# Altium PCB Prueba.PcbDoc
Units mil, origin at the board's own origin, x right, y up, seen from the top; angles counter-clockwise.
Board outline 6000 x 4000 mil, 2 copper layers (Top Layer, Bottom Layer); 65 components, 45 nets, 228 pads, 0 vias.
Unrouted connection lines stored in the file: 167.
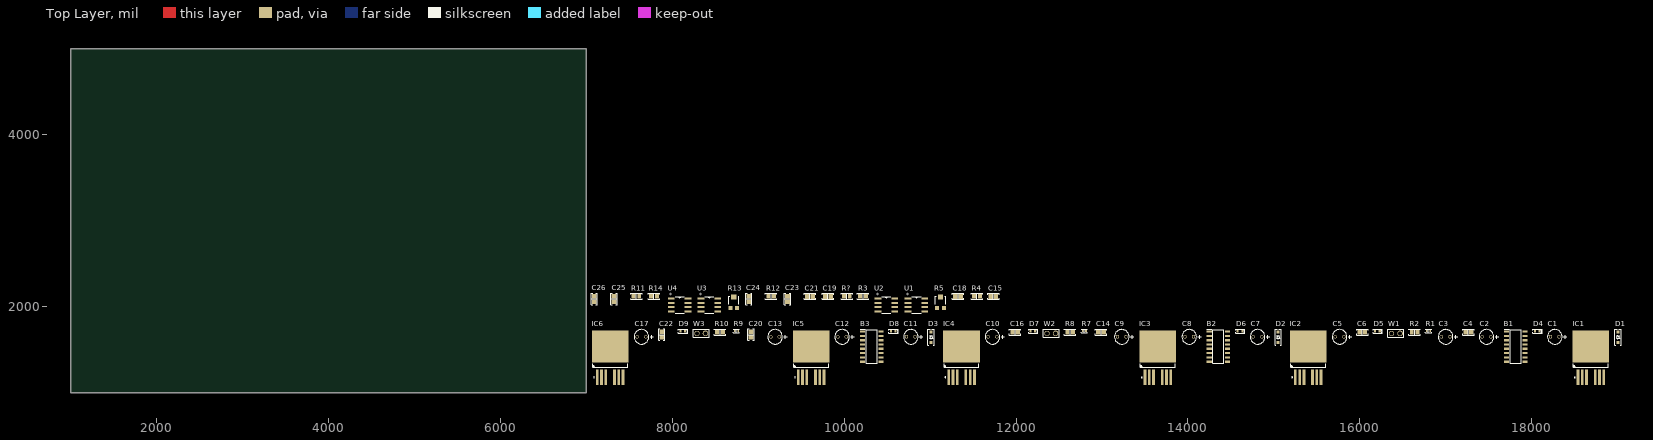
[diagram p0: Top Layer view]
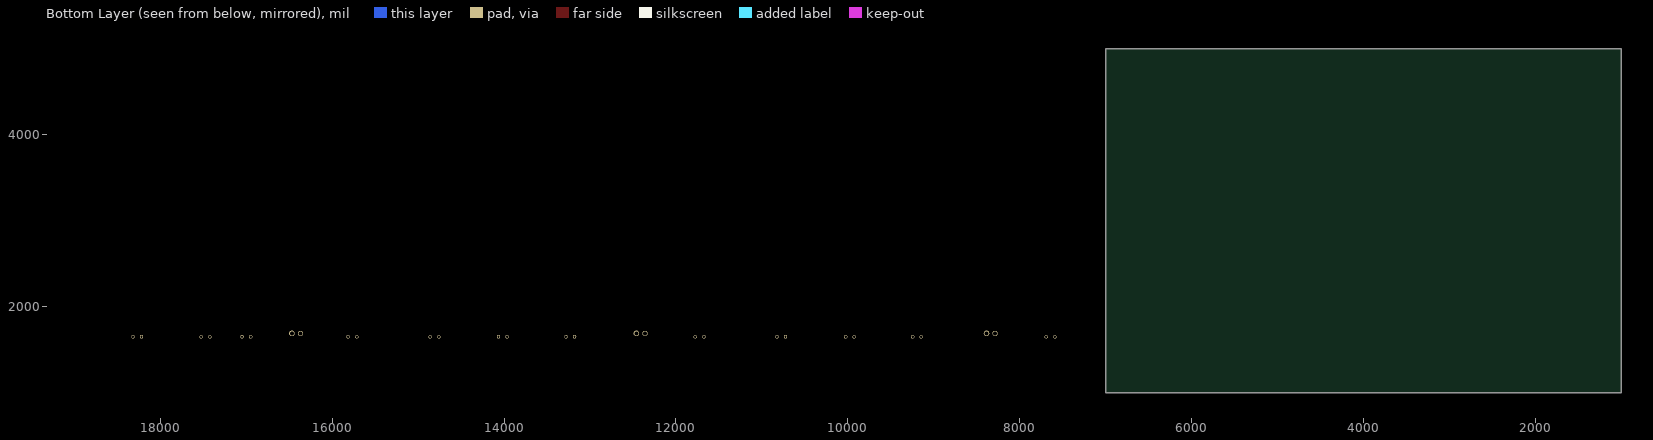
[diagram p1: Bottom Layer view, seen from below]

## Layer stack, top to bottom
Top Solder: solder mask 0.4, Solder Resist, Dk 3.5
Top Layer: signal copper 1.4
Dielectric 1: dielectric 12.6, FR-4, Dk 4.8
Bottom Layer: signal copper 1.4
Bottom Solder: solder mask 0.4, Solder Resist, Dk 3.5

## Board outline
1000,1000 7000,1000 7000,5000 1000,5000

## Design rules (kind name [scope] priority, off if disabled: settings)
Clearance [All] p1: gap=10 ignorepadtopadclearanceinfootprint=FALSE except(0: Arc-Hole Track-Hole SMDPad-Hole THPad-Hole Via-Hole Fill-Hole Poly-Hole Region-Hole Text-Hole)
PolygonConnect [All] p1: connectstyle=Relief reliefconductorwidth=10 reliefentries=4 polygonreliefangle="90 Angle" airgapwidth=10
RoutingVias [All] p1: holewidth=28 width=50 viastyle="Through Hole" minholewidth=28 minwidth=50 maxholewidth=28 maxwidth=50
SolderMaskExpansion [All] p1: expansion=4 istentingtop=FALSE
Width [All] p1: maxlimit=10 minlimit=10 preferedwidth=10
30 further rules are at their usual default settings.

## Components (designator, comment, footprint, x,y, rotation, side; value= is the part's Value field where it differs from the comment)
B1 "SI8238BB-D-IS1" SOIC127P600X175-16N 17815,1535 r0 top
B2 "SI8238BB-D-IS1" SOIC127P600X175-16N 14355,1535 r0 top
B3 "SI8238BB-D-IS1" SOIC127P600X175-16N 10320,1535 r0 top
C1 "Cap Pol1" CapacitorRadialElectrolytic 18220,1650 r0 top value=1uF
C2 "Cap Pol1" CapacitorRadialElectrolytic 17425,1650 r0 top value=CB
C3 "Cap Pol1" CapacitorRadialElectrolytic 16950,1650 r0 top value=1uF
C4 "0.1 µF" "CAP 0805_2012" 17265,1705 r0 top
C5 "Cap Pol1" CapacitorRadialElectrolytic 15715,1650 r0 top value=10uF
C6 "0.1 µF" "CAP 0805_2012" 16030,1705 r0 top
C7 "Cap Pol1" CapacitorRadialElectrolytic 14760,1650 r0 top value=1uF
C8 "Cap Pol1" CapacitorRadialElectrolytic 13965,1650 r0 top value=CB
C9 "Cap Pol1" CapacitorRadialElectrolytic 13180,1650 r0 top value=1uF
C10 "Cap Pol1" CapacitorRadialElectrolytic 11675,1650 r0 top value=10uF
C11 "Cap Pol1" CapacitorRadialElectrolytic 10725,1650 r0 top value=1uF
C12 "Cap Pol1" CapacitorRadialElectrolytic 9925,1650 r0 top value=CB
C13 "Cap Pol1" CapacitorRadialElectrolytic 9145,1650 r0 top value=1uF
C14 "0.1 µF" "CAP 0805_2012" 12990,1705 r0 top
C15 "0.1 µF" "CAP 0805_2012" 11735,2120 r0 top
C16 "0.1 µF" "CAP 0805_2012" 11990,1705 r0 top
C17 "Cap Pol1" CapacitorRadialElectrolytic 7590,1650 r0 top value=10uF
C18 "0.1 µF" "CAP 0805_2012" 11325,2120 r0 top
C19 "0.1 µF" "CAP 0805_2012" 9810,2120 r0 top
C20 "0.1 µF" "CAP 0805_2012" 8915,1675 r90 top
C21 "0.1 µF" "CAP 0805_2012" 9600,2120 r0 top
C22 "0.1 µF" "CAP 0805_2012" 7875,1675 r90 top
C23 "0.1 µF" "CAP 0805_2012" 9340,2090 r90 top
C24 "0.1 µF" "CAP 0805_2012" 8890,2090 r90 top
C25 "0.1 µF" "CAP 0805_2012" 7320,2090 r90 top
C26 "0.1 µF" "CAP 0805_2012" 7090,2090 r90 top
D1 "1N4148W-G RHG" SOD-123 19005,1645 r90 top
D2 "1N4148W-G RHG" SOD-123 15050,1645 r90 top
D3 "1N4148W-G RHG" SOD-123 11010,1645 r90 top
D4 "1PS79SB10,115" SOD-523 18065,1715 r0 top
D5 "1PS79SB10,115" SOD-523 16205,1715 r0 top
D6 "1PS79SB10,115" SOD-523 14605,1715 r0 top
D7 "1PS79SB10,115" SOD-523 12195,1715 r0 top
D8 "1PS79SB10,115" SOD-523 10570,1715 r0 top
D9 "1PS79SB10,115" SOD-523 8120,1715 r0 top
IC1 "IRFS3006TRL7PP" "INFINEON TO-263-7" 18690,1405 r90 top
IC2 "IRFS3006TRL7PP" "INFINEON TO-263-7" 15400,1405 r90 top
IC3 "IRFS3006TRL7PP" "INFINEON TO-263-7" 13650,1405 r90 top
IC4 "IRFS3006TRL7PP" "INFINEON TO-263-7" 11365,1405 r90 top
IC5 "IRFS3006TRL7PP" "INFINEON TO-263-7" 9615,1405 r90 top
IC6 "IRFS3006TRL7PP" "INFINEON TO-263-7" 7275,1405 r90 top
R1 "270 mOhms" "STACKPOLE CSR0402" 16800,1720 r0 top
R2 "RDT" "RES 0805_2012" 16640,1705 r0 top
R3 "?" "RES 0805_2012" 10220,2120 r0 top
R4 "?" "RES 0805_2012" 11545,2120 r0 top
R5 "20 kOhms" "POT BOURNS TRIMPOT TC33" 11120,2055 r0 top
R7 "270 mOhms" "STACKPOLE CSR0402" 12795,1720 r0 top
R8 "RDT" "RES 0805_2012" 12630,1705 r0 top
R9 "270 mOhms" "STACKPOLE CSR0402" 8745,1720 r0 top
R10 "RDT" "RES 0805_2012" 8555,1705 r0 top
R11 "?" "RES 0805_2012" 7580,2120 r0 top
R12 "?" "RES 0805_2012" 9150,2120 r0 top
R13 "20 kOhms" "POT BOURNS TRIMPOT TC33" 8715,2055 r0 top
R14 "?" "RES 0805_2012" 7785,2120 r0 top
R? "?" "RES 0805_2012" 10030,2120 r0 top
U1 "INA148UAG4" D8 10840,2020 r0 top
U2 "OPA277UA" D8 10490,2020 r0 top
U3 "INA148UAG4" D8 8430,2020 r0 top
U4 "OPA277UA" D8 8085,2020 r0 top
W1 "Jumper" Jumper_2_pos 16420,1690 r0 top
W2 "Jumper" Jumper_2_pos 12410,1690 r0 top
W3 "Jumper" Jumper_2_pos 8335,1690 r0 top

## Footprints (in the part's own frame and the unit in brackets; to place one, negate y for a bottom-side part, rotate by r counter-clockwise, add the part's x,y. Pads: shape width x height; smd on the part's side, far side on the other; paste and mask are expansions set on the pad)
"CAP 0805_2012" [mm] "Chip Capacitor, 2-Leads, Body 2.00x1.20mm, IPC Medium Density"
  rect 1.3x1.4 smd: 1(-0.8,0) 2(0.8,0)
  silkscreen extent -1.7,-0.9 1.7,0.9, body extent -1,-0.64 1,0.64, height 1.26
CapacitorRadialElectrolytic [mil]
  round 40 / inner round 50 / far side round 40 hole 28: 1(0,0) 2(100,0)
  silkscreen extent -35,-85 190,85
D8 [mil]
  rect 78x22 smd paste-39 mask-39: 1(-97,75) 2(-97,25) 3(-97,-25) 4(-97,-75) 5(97,-75) 6(97,-25) 7(97,25) 8(97,75)
  silkscreen extent -54,-98 54,98, body extent -122,-99 122,99, height 69
"INFINEON TO-263-7" [mm] "D2-PAK, 7-Pads, Body 7.82x8.52mm (max), IPC Medium Density"
  rect 4.6x0.8 smd: 1(-5.775,3.81) 2(-5.775,2.54) 3(-5.775,1.27) 5(-5.775,-1.27) 6(-5.775,-2.54) 7(-5.775,-3.81)
  rect 9.4x10.8 smd: 8(3.375,0)
  silkscreen extent -5.9,-5.15 -1.73,5.15, body extent -7.62,-5.08 7.63,5.08, height 4.54
Jumper_2_pos [mil] "2 pins jumper."
  round 60 hole 45: 1(-50,0)
  round 65 hole 45: 2(50,0)
  silkscreen extent -95,-45 95,50, body extent -78,-37 80,41, height 207
"POT BOURNS TRIMPOT TC33" [mm] "Bourns Trimpot TC33X-1 - Open Frame 3mm x 3.8mm x 1.2mm"
  rect 1.2x1.2 smd: 1(-1,-1.8) 3(1,-1.8)
  rect 1.6x1.5 smd: 2(0,1.45)
  silkscreen extent -1.5,-0.6 1.5,1.75, body extent -1.8,-1.91 1.8,1.95, height 1.15
"RES 0805_2012" [mm] "Chip Resistor, 2-Leads, Body 2.00x1.25mm, IPC Medium Density"
  rect 1.15x1.35 smd: 1(-0.875,0) 2(0.875,0)
  silkscreen extent -1.7,-0.9 1.7,0.9, body extent -1,-0.62 1,0.63, height 0.6
SOD-123 [mm] "SOD, 2-Leads, Body 1.55x3.70mm, IPC Medium Density"
  rect 0.9x0.95 smd: 1(-1.575,0) 2(1.575,0)
  silkscreen extent -2.3,-0.92 2.41,0.92, body extent -1.86,-0.78 1.86,0.77, height 1.35
SOD-523 [mm] "Molded Diode, 2-Leads, Body 1.60x0.80mm, IPC Medium Density"
  rect 0.6x0.7 smd: 1(-0.71,0) 2(0.71,0)
  silkscreen extent -1.27,-0.6 1.47,0.6, body extent -0.8,-0.4 0.8,0.4, height 0.82
SOIC127P600X175-16N [mm]
  rect 1.5x0.65 smd: 1(-2.7,4.445) 2(-2.7,3.175) 3(-2.7,1.905) 4(-2.7,0.635) 5(-2.7,-0.635) 6(-2.7,-1.905) 7(-2.7,-3.175) 8(-2.7,-4.445) 9(2.7,-4.445) 10(2.7,-3.175) 11(2.7,-1.905) 12(2.7,-0.635) 13(2.7,0.635) 14(2.7,1.905) 15(2.7,3.175) 16(2.7,4.445)
  silkscreen extent -3.45,-4.95 1.6,5.12
"STACKPOLE CSR0402" [mm] "Chip Resistor, 2-Leads, Body 1.0x0.5mm, IPC Medium Density"
  rect 0.5x0.6 smd: 1(-0.5,0) 2(0.5,0)
  silkscreen extent -0.9,-0.51 0.9,0.51, body extent -0.52,-0.25 0.53,0.25, height 0.32

## Part data
B1 B2 B3: "SILICON LABS - SI8238BB-D-IS1 - DIGITAL ISOLATOR, 30NS, NSOIC-16", Manufacturer_Name="Silicon Labs", Mouser Part Number=634-SI8238BB-D-IS1, Arrow Part Number=SI8238BB-D-IS1, Arrow Price/Stock=https://www.arrow.com/en/products/si8238bb-d-is1/silicon-labs, Datasheet Link=https://datasheet.datasheetarchive.com/originals/distributors/DKDS-37/728994.pdf, Geometry.Height=1.75mm, Manufacturer_Part_Number=SI8238BB-D-IS1, Mouser Price/Stock=https://www.mouser.co.uk/ProductDetail/Silicon-Labs/SI8238BB-D-IS1?qs=p9T7GgSe1IEr3RhvGCWqzw%3D%3D
C1 C2 C3 C5 C7 C8 C9 C10 C11 C12 C13 C17: "Polarized Capacitor (Radial)", LatestRevisionDate=17-Jul-2002, LatestRevisionNote="Re-released for DXP Platform.", PackageDescription="Polarized Capacitor (Radial); 2 Leads", PackageReference=RB7.6-15, Published=8-Jun-2000, Publisher="Altium Limited"
C4 C6 C14 C15 C16 C18 C19 C20 C21 C22 C23 C24 C25 C26: library part CC0805MRX7R9BB104, "CAP CER 0.1UF 50V X7R 0805", Device Package="0805 (2012 Metric)", Manufacturer=Yageo, Operating Temperature="-55°C ~ 125°C", Supplier Part Number 1=311-4351-1-ND, Temperature Coefficient=X7R, Tolerance=±20%, Voltage - Rated=50V, Applications="General Purpose", Capacitance="0.1 µF", ComponentLink1Description=Datasheet, ComponentLink1URL=https://www.yageo.com/upload/media/product/productsearch/datasheet/mlcc/UPY-GPHC_X7R_6.3V-to-50V_18.pdf, ComponentLink2Description="DigiKey Link", ComponentLink2URL=https://www.digikey.com/en/products/detail/yageo/CC0805MRX7R9BB104/5884281, LastUpdated="15/11/2023 20:14:20", Lifecycle Status=Active, Minimum Order=1, Mounting Type="Surface Mount, MLCC", Package / Case="0805 (2012 Metric)", Packaging=TapeAndReel, Part Number=CC0805MRX7R9BB104, Part Status=Active, PartId=2475, Price=0.01, Series=CC, Size / Dimension="0.079\" L x 0.049\" W (2.00mm x 1.25mm)", Supplier 1=DigiKey, Thickness (Max)="0.037\" (0.95mm)"
D1 D2 D3: "DIODE GEN PURP 100V 150MA SOD123", Capacitance @ Vr, F="2pF @ 0V, 1MHz", Current - Average Rectified (Io)=150mA, Current - Reverse Leakage @ Vr="2.5 µA @ 75 V", Manufacturer="Taiwan Semiconductor Corporation", Operating Temperature - Junction="-65°C ~ 150°C", Package / Case=SOD-123, Supplier Part Number 1=1N4148W-GRHGCT-ND, Voltage - DC Reverse (Vr) (Max)="100 V", Voltage - Forward (Vf) (Max) @ If="1.25 V @ 150 mA", ComponentLink1Description=Datasheet, ComponentLink1URL=https://www.taiwansemi.com/products/datasheet/1N4148W-G_D1601.pdf, ComponentLink2Description="DigiKey Link", ComponentLink2URL=https://www.digikey.com/en/products/detail/taiwan-semiconductor-corporation/1N4148W-G-RHG/7374103, Diode Type=Standard, LastUpdated="02/11/2023 20:45:33", Lifecycle Status=Active, Minimum Order=1, Mounting Type="Surface Mount", Packaging=TapeAndReel, Part Number="1N4148W-G RHG", Part Status=Active, PartId=1018, Price=0.02, Reverse Recovery Time (trr)="4 ns", Series=-, Speed="Small Signal =< 200mA (Io), Any Speed", Supplier 1=DigiKey, Supplier Device Package=SOD-123
D4 D5 D6 D7 D8 D9: "DIODE SCHOTTKY 30V 200MA SOD523", Capacitance @ Vr, F="10pF @ 1V, 1MHz", Current - Average Rectified (Io)=200mA, Current - Reverse Leakage @ Vr="2 µA @ 25 V", Manufacturer="Nexperia USA Inc.", Operating Temperature - Junction="125°C (Max)", Package / Case="SC-79, SOD-523", Supplier Device Package=SOD-523, Supplier Part Number 1=1727-4780-1-ND, Voltage - DC Reverse (Vr) (Max)="30 V", Voltage - Forward (Vf) (Max) @ If="800 mV @ 100 mA", ComponentLink1Description=Datasheet, ComponentLink1URL=https://assets.nexperia.com/documents/data-sheet/1PS79SB10.pdf, ComponentLink2Description="DigiKey Link", ComponentLink2URL=https://www.digikey.com/en/products/detail/nexperia-usa-inc/1PS79SB10-115/1229075, Diode Type=Schottky, LastUpdated="23/11/2023 21:28:29", Lifecycle Status=Active, Minimum Order=1, Mounting Type="Surface Mount", Packaging=TapeAndReel, Part Number=1PS79SB10,115, Part Status=Active, PartId=2828, Price=0.03, Series=-, Speed="Small Signal =< 200mA (Io), Any Speed", Supplier 1=DigiKey
IC1 IC2 IC3 IC4 IC5 IC6: "MOSFET N-CH 60V 240A D2PAK", Current - Continuous Drain (Id) @ 25°C="240A (Tc)", Drain to Source Voltage (Vdss)="60 V", Drive Voltage (Max Rds On,  Min Rds On)=10V, Input Capacitance (Ciss) (Max) @ Vds="8850 pF @ 50 V", Manufacturer="Infineon Technologies", Operating Temperature="-55°C ~ 175°C (TJ)", Package / Case="TO-263-7, D²Pak (6 Leads + Tab), TO-263CB", Power Dissipation (Max)="375W (Tc)", Supplier Device Package="D2PAK (7-Lead)", Supplier Part Number 1=IRFS3006TRL7PPCT-ND, ComponentLink1Description=Datasheet, ComponentLink1URL=https://www.infineon.com/dgdl/irfs3006-7ppbf.pdf?fileId=5546d462533600a4015356364189214d, ComponentLink2Description="DigiKey Link", ComponentLink2URL=https://www.digikey.com/en/products/detail/infineon-technologies/IRFS3006TRL7PP/2096605, FET Type=N-Channel, Gate Charge (Qg) (Max) @ Vgs="300 nC @ 10 V", LastUpdated="01/11/2023 20:47:46", Lifecycle Status=Active, Minimum Order=1, Mounting Type="Surface Mount", Packaging=TapeAndReel, Part Number=IRFS3006TRL7PP, Part Status=Active, Price=2.81, Rds On (Max) @ Id, Vgs="2.1mOhm @ 168A, 10V", Series=HEXFET®, Supplier 1=DigiKey, Technology="MOSFET (Metal Oxide)", Vgs (Max)=±20V, Vgs(th) (Max) @ Id="4V @ 250µA"
R1 R7 R9: library part RL73N1ER27JTD, "RES 0.27 OHM 5% 1/16W 0402", Device Package="0402 (1005 Metric)", Manufacturer="TE Connectivity Passive Product", Operating Temperature="-55°C ~ 155°C", Power (Watts)="0.063W, 1/16W", Supplier Device Package=0402, Supplier Part Number 1=A138777CT-ND, Temperature Coefficient=±300ppm/°C, Tolerance=±5%, ComponentLink1Description=Datasheet, ComponentLink1URL=https://www.te.com/commerce/DocumentDelivery/DDEController?Action=srchrtrv&DocNm=1773269&DocType=DS&DocLang=English, ComponentLink2Description="DigiKey Link", ComponentLink2URL=https://www.digikey.com/en/products/detail/te-connectivity-passive-product/RL73N1ER27JTD/2364932, Composition="Thick Film", Features="Current Sense", Height - Seated (Max)="0.017\" (0.43mm)", LastUpdated="02/11/2023 20:28:47", Lifecycle Status=Active, Minimum Order=1, Number of Terminations=2, Package / Case="0402 (1005 Metric)", Packaging=TapeAndReel, Part Number=RL73N1ER27JTD, Part Status=Active, PartId=5, Price=0.03, Resistance="270 mOhms", Series="RL73, CGS", Size / Dimension="0.039\" L x 0.020\" W (1.00mm x 0.50mm)", Supplier 1=DigiKey
R2 R3 R4 R8 R10 R11 R12 R14 R?: library part CR0805-JW-204ELF, "RES SMD 200K OHM 5% 1/8W 0805", Device Package="0805 (2012 Metric)", Manufacturer="Bourns Inc.", Operating Temperature="-55°C ~ 155°C", Power (Watts)="0.125W, 1/8W", Resistance="200 kOhms", Supplier Device Package=0805, Supplier Part Number 1=118-CR0805-JW-204ELFCT-ND, Temperature Coefficient=±200ppm/°C, Tolerance=±5%, ComponentLink1Description=Datasheet, ComponentLink1URL=https://www.bourns.com/docs/product-datasheets/cr.pdf?sfvrsn=574d41f6_14, ComponentLink2Description="DigiKey Link", ComponentLink2URL=https://www.digikey.com/en/products/detail/bourns-inc/CR0805-JW-204ELF/3785267, Composition="Thick Film", Features="Moisture Resistant", Height - Seated (Max)="0.024\" (0.60mm)", LastUpdated="02/11/2023 20:02:13", Lifecycle Status=Active, Minimum Order=1, Number of Terminations=2, Package / Case="0805 (2012 Metric)", Packaging=TapeAndReel, Part Number=CR0805-JW-204ELF, Part Status=Active, PartId=69673, Price=0.01, Series=CR0805, Size / Dimension="0.079\" L x 0.049\" W (2.00mm x 1.25mm)", Supplier 1=DigiKey
R5 R13: library part TC33X-1-104E, "TRIMMER 100K OHM 0.1W J LEAD TOP", Manufacturer="Bourns Inc.", Power (Watts)="0.1W, 1/10W", Resistive Material=Cermet, Supplier Part Number 1=TC33X-1-104ECT-ND, Temperature Coefficient=±250ppm/°C, Tolerance=±25%, Adjustment Type="Top Adjustment", ComponentLink1Description=Datasheet, ComponentLink1URL=https://www.bourns.com/docs/Product-Datasheets/TC33.pdf, ComponentLink2Description="DigiKey Link", ComponentLink2URL=https://www.digikey.com/en/products/detail/bourns-inc/TC33X-1-104E/2566868, LastUpdated="10/11/2023 21:32:20", Lifecycle Status=Active, Minimum Order=1, Mounting Type="Surface Mount", Number of Turns=1, Packaging=TapeAndReel, Part Number=TC33X-1-104E, Part Status=Active, PartId=1, Price=0.11, Resistance="20 kOhms", Series="Trimpot® TC33 - Open Frame", Size / Dimension="Rectangular - 0.150\" x 0.142\" Face (3.80mm x 3.60mm)", Supplier 1=DigiKey, Termination Style="J Lead"
U1 U2 U3 U4: "No Description Available", Mfr_Name="Texas Instruments", Copyright="Copyright (C) 2023 Ultra Librarian. All rights reserved.", RefDes=RefDes, Type=DEV
  U1 U3: Manufacturer_Part_Number=INA148UAG4
  U2 U4: Manufacturer_Part_Number=OPA277UA
W1 W2 W3: "Jumper Wire", LatestRevisionDate=17-Jul-2002, LatestRevisionNote="Re-released for DXP Platform.", PackageDescription="Radial Cap, Thru-Hole; 2 Leads; 0.2 in Pin Spacing", PackageReference=RAD-0.2, Published=24-Mar-1999, Publisher="Altium Limited"

## Nets (pads, with @x,y where several pads share a name; then routed paths per layer and width w, separated by ;. In a path a pad name is that pad's centre, name@x,y a point inside that pad or via, vN(x,y) a via of type N, cw(c..) or ccw(c..) an arc to the next point about the centre after c; other vN are vias at no path point)
-V12: C19.2 C21.2 C25.2 C26.2 U1.4 U2.4 U3.4 U4.4
AGND: B1.9 B2.9 B3.9 C1.2 C5.2 C6.1 C7.2 C10.2 C11.2 C16.1 C17.2 C22.1 D5.1 D7.1 D9.1 IC2.2 IC2.3 IC2.5 IC2.6 IC2.7 IC4.2 IC4.3 IC4.5 IC4.6 IC4.7 IC6.2 IC6.3 IC6.5 IC6.6 IC6.7
DISABLE_GPIO: B1.5 B2.5 B3.5
GND: B1.4 B2.4 B3.4 C3.2 C4.1 C9.2 C13.2 C14.1 C15.2 C18.2 C19.1 C20.1 C21.1 C23.2 C24.2 C25.1 C26.1 R2.1 R8.1 R10.1 R11.2 R?.1 U1.1 U3.1 W1.1 W2.1 W3.1
NetB1_6: B1.6 R2.2 W1.2
NetB1_10: B1.10 IC2.1
NetB1_11: B1.11 C5.1 C6.2
NetB1_14: B1.14 C2.2 D4.1 D5.2 IC1.2 IC1.3 IC1.5 IC1.6 IC1.7 IC2.8 R1.1 U1.2
NetB1_15: B1.15 IC1.1
NetB1_16: B1.16 C2.1 D1.2
NetB2_6: B2.6 R8.2 W2.2
NetB2_10: B2.10 IC4.1
NetB2_11: B2.11 C10.1 C16.2
NetB2_14: B2.14 C8.2 D6.1 D7.2 IC3.2 IC3.3 IC3.5 IC3.6 IC3.7 IC4.8 R7.1 U3.2
NetB2_15: B2.15 IC3.1
NetB2_16: B2.16 C8.1 D2.2
NetB3_6: B3.6 R10.2 W3.2
NetB3_10: B3.10 IC6.1
NetB3_11: B3.11 C17.1 C22.2
NetB3_14: B3.14 C12.2 D8.1 D9.2 IC5.2 IC5.3 IC5.5 IC5.6 IC5.7 IC6.8 R9.1
NetB3_15: B3.15 IC5.1
NetB3_16: B3.16 C12.1 D3.2
NetR3_1: R3.1 R4.2 U2.2
NetR3_2: R3.2 U1.6
NetR5_1: R5.1 U2.8
NetR5_3: R5.3 U2.1
NetR11_1: R11.1 U4.3
NetR12_1: R12.1 R14.2 U4.2
NetR13_1: R13.1 U4.8
NetR13_3: R13.3 U4.1
NetR14_1: R14.1 U3.6
NetR?_2: R?.2 U2.3
PHA: R1.2 U1.3
PHA_A_ADC: R4.1 U2.6
PHA_B_ADC: U4.6
PHB: R7.2 U3.3
PHC: R9.2
PWM1_A: B1.1
PWM1_B: B1.2
PWM2_A: B2.1
PWM2_B: B2.2
PWM3_A: B3.1
PWM3_B: B3.2
V5: B1.3 B1.8 B2.3 B2.8 B3.3 B3.8 C3.1 C4.2 C9.1 C13.1 C14.2 C20.2
V12: C1.1 C7.1 C11.1 C15.1 C18.1 C23.1 C24.1 D1.1 D2.1 D3.1 D4.2 D6.2 D8.2 IC1.8 IC3.8 IC5.8 R5.2 R13.2 U1.7 U2.7 U3.7 U4.7
pads on no net: B1.7 B1.12 B1.13 B2.7 B2.12 B2.13 B3.7 B3.12 B3.13 R12.2 U1.5 U1.8 U2.5 U3.5 U3.8 U4.5

## Text inside footprints (layer, text, board x,y; h text height)
U1: Top Overlay "*" at 10720.5,2112 h50; Mechanical 13 "*" at 10720.5,2112 h50
U2: Top Overlay "*" at 10370.5,2112 h50; Mechanical 13 "*" at 10370.5,2112 h50
U3: Top Overlay "*" at 8310.5,2112 h50; Mechanical 13 "*" at 8310.5,2112 h50
U4: Top Overlay "*" at 7965.5,2112 h50; Mechanical 13 "*" at 7965.5,2112 h50